# EAGLE board Buck (EAGLE 9.6.2)
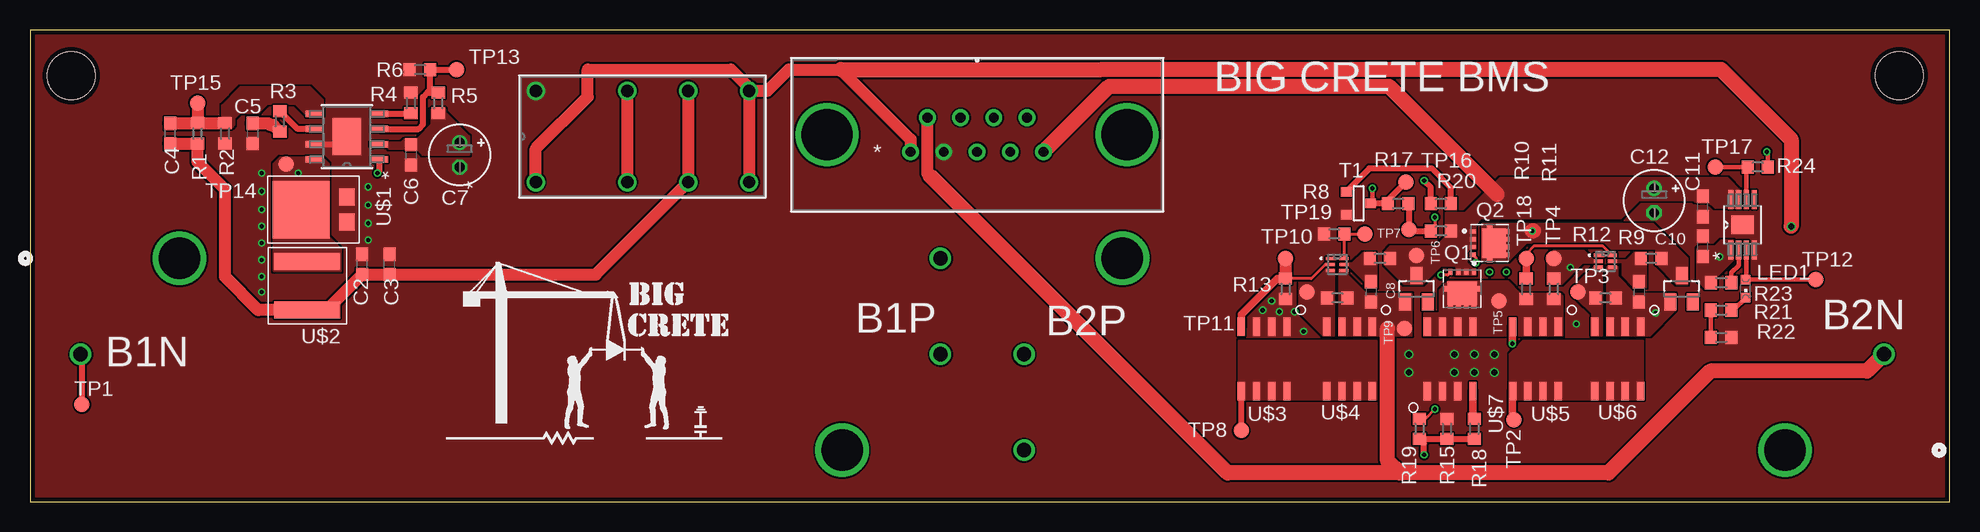
[diagram p0: board, top side]
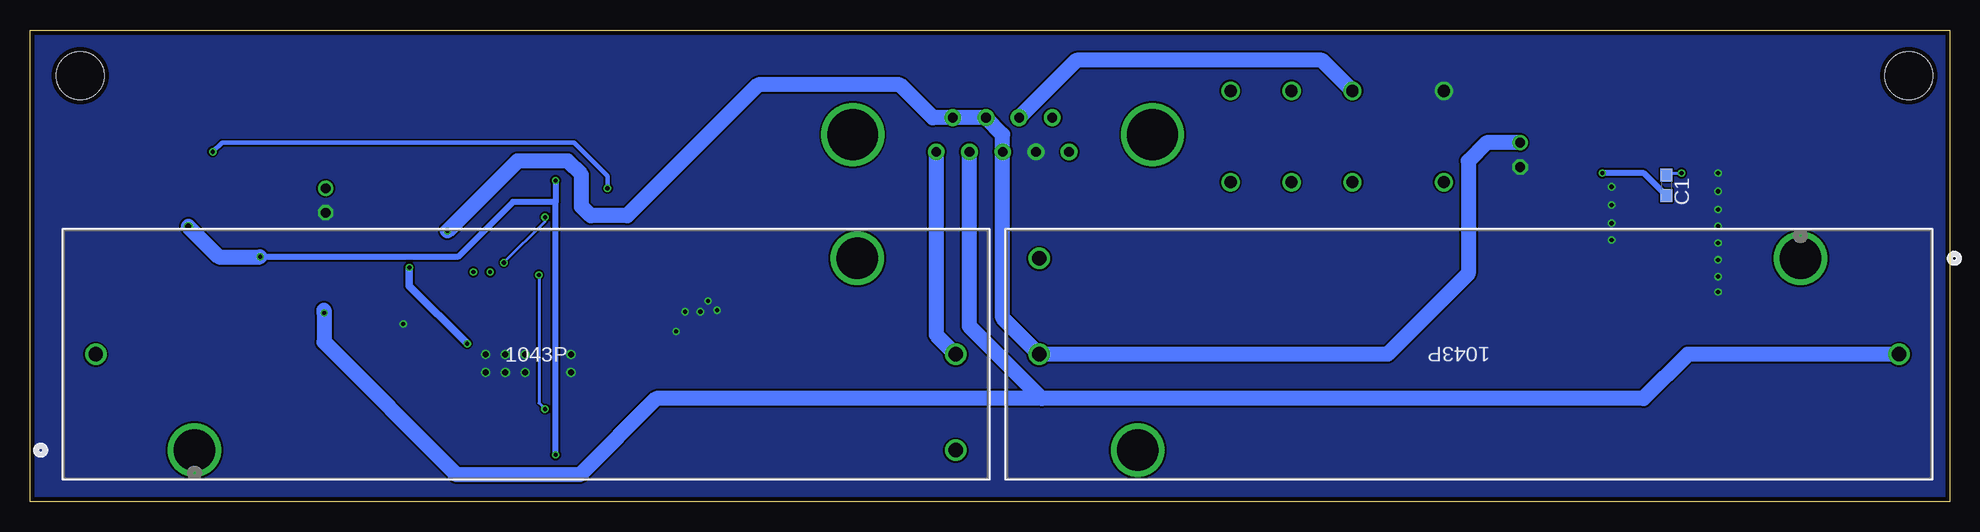
[diagram p1: board, bottom side, seen from below]

Size 160.02 x 39.37 mm. Coordinates in mm from the lower left corner, seen from the top.
Outline: 0,0 160.02,0 160.02,39.37 0,39.37 0,0
Copper layers (1*16): Top 0.035559375mm / dielectric 1.6mm / Bottom 0.035559375mm
Design rules "oshpark-2layer": minimum track width 6mil, minimum drill 10mil, track to track 6mil, track to pad 6mil, pad to pad 6mil, via to via 6mil, smd to smd 6mil, copper to edge 15mil, drill to drill 6mil, minimum pad ring 5mil, minimum via ring 5mil, stop-mask expansion 2.5mil, vias tented up to drill 0mil, thermal gap 10mil
Holes 3.99 mm at 3.43,35.56 155.83,35.56

## Footprints (pad centres in the part's own frame; a part is rotated, then mirrored left to right if it is on the bottom)
C0603 = smd 1.1 x 1: 1 -0.85,0; 2 0.85,0
E2-5 = drill 0.813 pad 1.27: + -1.016,0 | drill 0.813 pad 1.27 octagon: - 1.016,0
SOT23 = smd 1 x 1.4: 1 -0.95,-1.1; 2 0.95,-1.1; 3 0,1.1
CONN2_1043P_KEY = drill 3.454 pad 3.962: 1 0,0; 3 55.245,16.002 | drill 1.194 pad 1.194: 2 63.449,8.001; 4 -8.23,8.001; 5 63.449,0
CONN_L77TSEH09SOL2_AMP = drill 0.813 pad 1.397: 1 0,0; 2 2.769,0; 3 5.537,0; 4 8.306,0; 5 11.074,0; 6 1.397,2.845; 7 4.166,2.845; 8 6.934,2.845; 9 9.703,2.845 | drill 4.242 pad 4.242: 10 -6.96,1.422; 11 18.034,1.422
CHIPLED_0603 = smd 0.8 x 0.8: A 0,-0.75; C 0,0.75
TRANS_AONR21321 = smd 0.5 x 0.35: 1 -1.4,0.975; 2 -1.4,0.325; 3 -1.4,-0.325; 4 -1.4,-0.975 | smd 0.3 x 0.4: 5 1.5,-0.975; 6 1.5,-0.325; 7 1.5,0.325; 8 1.5,0.975 | smd 1.98 x 2.45: 9 0.36,0 | smd 0.43 x 0.38: 9_1 0,1.415; 9_2 0,-1.415
R0603 = smd 1 x 1.1: 1 -0.85,0; 2 0.85,0
SOT-23 = smd 0.787 x 0.889: 1 0.025,-1.016; 2 -0.94,1.016; 3 0.991,1.016
TP13R = smd 1.3 x 1.3: TP 0,0
DDA8_3P1X2P4_TEX = smd 1.46 x 0.533: 1 -2.724,1.905; 2 -2.724,0.635; 3 -2.724,-0.635; 4 -2.724,-1.905; 5 2.724,-1.905; 6 2.724,-0.635; 7 2.724,0.635; 8 2.724,1.905 | smd 2.4 x 3.1: EPAD 0,0
DSE6_TEX = smd 0.85 x 0.28: 1 -0.525,0.5 | smd 0.75 x 0.28: 2 -0.575,0; 3 -0.575,-0.5; 4 0.575,-0.5; 5 0.575,0; 6 0.575,0.5
DGN8_1P57X1P89 = smd 1.575 x 0.432: 1 -2.095,0.975; 2 -2.095,0.325; 3 -2.095,-0.325; 4 -2.095,-0.975; 5 2.095,-0.975; 6 2.095,-0.325; 7 2.095,0.325; 8 2.095,0.975 | smd 1.57 x 1.89: 9 0,0
RELAY8_J104D2C5VDC.20S_CRS = drill 1.016 pad 1.524: 1 0,0; 2 0,-7.62; 3 0,-12.7; 4 0,-17.78; 5 7.62,-17.78; 6 7.62,-12.7; 7 7.62,-7.62; 8 7.62,0
TO-227A = smd 1.397 x 1.27: A$1 -1.041,-3.81; A$2 1.041,-3.81 | smd 4.801 x 4.724: K 0,0
XAL6060 = smd 1.422 x 5.486: 1 -2.019,0; 2 2.019,0
SO-8 = smd 0.61 x 1.549: 1 -1.905,-2.692; 2 -0.635,-2.692; 3 0.635,-2.692; 4 1.905,-2.692; 5 1.905,2.692; 6 0.635,2.692; 7 -0.635,2.692; 8 -1.905,2.692

## Placement (x,y rotation side)
C1  0.1uF  [C0603]  23.62,26.42 270 bottom
C2  22uF  [C0603]  27.69,19.81 90 top
C3  22uF  [C0603]  29.97,19.81 90 top
C4  220pF  [C0603]  11.68,30.73 90 top
C5  0.01uF  [C0603]  18.54,30.73 270 top
C6  4.7uF  [C0603]  31.75,28.96 270 top
C7  47uF  [E2-5]  35.81,28.96 270 top
C8  0.1uF  [C0603]  111.76,17.53 270 top
C9  0.1uF  [C0603]  134.11,17.53 270 top
C10  0.1uF  [C0603]  139.45,21.34 90 top
C11  0.1uF  [C0603]  139.45,24.64 90 top
C12  47uF  [E2-5]  135.38,25.15 270 top
D1  [SOT23]  137.67,17.78 0 top
D2  [SOT23]  115.57,17.78 0 top
J1  1043P  [CONN2_1043P_KEY]  12.45,20.32 180 bottom
J2  1043P  [CONN2_1043P_KEY]  146.3,4.32 0 bottom
J3  L77TSEH09SOL2  [CONN_L77TSEH09SOL2_AMP]  73.41,29.21 0 top
LED1  [CHIPLED_0603]  143,17.78 180 top
Q1  AONR21321  [TRANS_AONR21321]  119.38,17.78 270 top
Q2  AONR21321  [TRANS_AONR21321]  121.67,21.59 0 top
R1  52.3k  [R0603]  13.97,30.73 270 top
R2  10k  [R0603]  16.26,30.73 90 top
R3  12.7k  [R0603]  20.83,31.75 90 top
R4  174k  [R0603]  31.75,33.27 270 top
R5  45k  [R0603]  34.04,33.27 270 top
R6  10k  [R0603]  32.51,36.07 0 top
R7  330  [R0603]  112.52,20.32 180 top
R8  2.2k  [R0603]  108.71,22.35 180 top
R9  330  [R0603]  135.13,20.32 180 top
R10  2.2k  [R0603]  124.71,17.78 270 top
R11  5M  [R0603]  127,17.78 90 top
R12  5M  [R0603]  131.32,17.02 0 top
R13  5M  [R0603]  104.65,17.78 90 top
R14  5M  [R0603]  108.97,17.02 0 top
R15  10k  [R0603]  118.11,6.1 90 top
R16  10k  [R0603]  117.6,22.61 0 top
R17  100  [R0603]  114.05,24.89 0 top
R18  100  [R0603]  120.4,6.1 270 top
R19  100  [R0603]  115.82,6.1 90 top
R20  100  [R0603]  117.6,24.89 180 top
R21  100  [R0603]  140.97,16 180 top
R22  100  [R0603]  140.97,13.72 0 top
R23  10  [R0603]  140.97,18.29 180 top
R24  100  [R0603]  144.02,27.94 180 top
T1  [SOT-23]  110.74,24.89 90 top
TP1  TPTP13R  [TP13R]  4.32,8.13 0 top
TP2  TPTP13R  [TP13R]  123.7,6.86 0 top
TP3  TPTP13R  [TP13R]  129.03,17.53 0 top
TP4  TPTP13R  [TP13R]  127,20.32 0 top
TP5  TPTP13R  [TP13R]  122.43,16.76 0 top
TP6  TPTP13R  [TP13R]  115.57,20.57 0 top
TP7  TPTP13R  [TP13R]  114.94,22.73 0 top
TP8  TPTP13R  [TP13R]  100.97,5.97 0 top
TP9  TPTP13R  [TP13R]  114.55,14.48 0 top
TP10  TPTP13R  [TP13R]  104.65,20.32 0 top
TP11  TPTP13R  [TP13R]  106.43,17.53 0 top
TP12  TPTP13R  [TP13R]  148.84,18.54 0 top
TP13  TPTP13R  [TP13R]  35.56,36.07 0 top
TP14  TPTP13R  [TP13R]  21.34,28.19 0 top
TP15  TPTP13R  [TP13R]  13.97,33.27 0 top
TP16  TPTP13R  [TP13R]  114.68,26.67 0 top
TP17  TPTP13R  [TP13R]  140.46,27.94 0 top
TP18  TPTP13R  [TP13R]  124.71,20.32 0 top
TP19  TPTP13R  [TP13R]  111.25,22.35 0 top
U1  TPS54540DDA  [DDA8_3P1X2P4_TEX]  26.42,30.48 180 top
U2  BQ29732DSER  [DSE6_TEX]  108.97,19.81 0 top
U3  BQ29732DSER  [DSE6_TEX]  131.32,20.07 0 top
U4  BQ24202DGN  [DGN8_1P57X1P89]  142.75,23.11 90 top
U5  J104D2C5VDC.20S  [RELAY8_J104D2C5VDC.20S_CRS]  42.16,26.67 90 top
U$1  SS3P5LHM3_A/H  [TO-227A]  22.61,24.38 90 top
U$2  XAL6060-223MEC  [XAL6060]  23.11,18.03 270 top
U$3  DMG4496SSS  [SO-8]  102.87,11.94 180 top
U$4  DMG4496SSS  [SO-8]  109.98,11.94 180 top
U$5  DMG4496SSS  [SO-8]  125.48,11.94 180 top
U$6  DMG4496SSS  [SO-8]  132.33,11.94 180 top
U$7  DMG4496SSS  [SO-8]  118.36,11.94 0 top

## Library data of the parts
C1-C12 = rcl; SPICEPREFIX: C
D1 D2 = diode
J1 J2 = BIGCRETE; COPYRIGHT: Copyright (C) 2022 Ultra Librarian. All rights reserved.; DIGI-KEY_PART_NUMBER_1: 36-1043P-ND; MANUFACTURER_PART_NUMBER: 1043P; MFR_NAME: Keystone Electronics
J3 = BIGCRETE; COPYRIGHT: Copyright (C) 2022 Ultra Librarian. All rights reserved.; DIGI-KEY_PART_NUMBER_1: L77TSEH09SOL2-ND; MANUFACTURER_PART_NUMBER: L77TSEH09SOL2; MFR_NAME: Amphenol ICC
LED1 = led
Q1 Q2 = AONR21321; DESCRIPTION: P-Channel 30 V 24A (Tc) 4.1W (Ta), 24W (Tc) Surface Mount 8-DFN-EP (3x3); DIGI-KEY_PART_NUMBER: 785-1797-2-ND; MF: Alpha &; MP: AONR21321; PACKAGE: PowerVDFN-8 Alpha &amp; Omega Semiconductor Inc.
R1-R24 = rcl; SPICEPREFIX: R
T1 = zetex; OC_FARNELL: unknown; OC_NEWARK: unknown
TP1-TP19 = testpad
U1 = BIGCRETE; COPYRIGHT: Copyright (C) 2022 Ultra Librarian. All rights reserved.; MANUFACTURER_PART_NUMBER: TPS54540DDA; MFR_NAME: Texas Instruments
U2 U3 = BIGCRETE; COPYRIGHT: Copyright (C) 2022 Ultra Librarian. All rights reserved.; MANUFACTURER_PART_NUMBER: BQ29732DSER; MFR_NAME: Texas Instruments
U4 = BIGCRETE; COPYRIGHT: Copyright (C) 2022 Ultra Librarian. All rights reserved.; DIGI-KEY_PART_NUMBER_1: 296-12411-5-ND; DIGI-KEY_PART_NUMBER_2: 2156-BQ24202DGN-ND; MANUFACTURER_PART_NUMBER: BQ24202DGN; MFR_NAME: Texas Instruments
U5 = BIGCRETE; COPYRIGHT: Copyright (C) 2022 Ultra Librarian. All rights reserved.; DIGI-KEY_PART_NUMBER_1: 2449-J104D2C5VDC.20S-ND; MANUFACTURER_PART_NUMBER: J104D2C5VDC.20S; MFR_NAME: CIT Relay & Switch
U$1-U$7 = BIGCRETE

## Nets
B1N: C9.2 D1.1 J1.4 J3.4 R12.2 TP1.TP U3.4 U$6.1 U$6.2 U$6.3
B1P: C6.1 C7.+ D1.3 J1.2 J3.3 J3.8 J3.9 Q2.5 Q2.6 Q2.7 Q2.8 Q2.9 Q2.9_1 Q2.9_2 R5.2 R9.1 U1.2
B2N: C8.2 D2.1 J2.4 J3.6 R14.2 TP9.TP U2.4 U$4.1 U$4.2 U$4.3
B2P: C11.2 C12.+ D2.3 J2.2 J3.5 Q1.1 Q1.2 Q1.3 Q2.1 Q2.2 Q2.3 R7.1 R16.2 TP6.TP U4.7 U4.8
CHARGE: C10.1 J3.1 R15.1 R18.2 R19.1 R20.2 R23.2 U4.1 U5.1 U5.4 U5.5
FPGA_OUT: J3.7 U5.2 U5.7
GND: C2.2 C3.2 C5.2 C6.2 C7.- C10.2 C11.1 C12.- J3.2 R2.1 R4.1 R6.1 R8.2 R13.1 R15.2 R22.2 T1.2 U1.7 U1.EPAD U4.4 U4.9 U5.8 U$1.A$1 U$1.A$2 U$3.1 U$3.2 U$3.3 U$7.1 U$7.2 U$7.3
N$1: C1.2 U1.1
N$2: C1.1 TP14.TP U1.8 U$1.K U$2.1
N$3: C2.1 C3.1 C4.1 R1.2 U5.3 U5.6 U$2.2
N$4: C5.1 R3.1
N$5: C4.2 R1.1 R2.2 TP15.TP U1.5
N$6: R3.2 U1.6
N$7: Q2.4 R16.1 R17.2 TP7.TP
N$8: R4.2 U1.4
N$9: R5.1 R6.2 TP13.TP U1.3
N$10: TP8.TP U$3.5 U$3.6 U$3.7 U$3.8 U$4.5 U$4.6 U$4.7 U$4.8
N$11: R13.2 TP10.TP U2.2 U$3.4
N$12: R14.1 TP11.TP U2.3 U$4.4
N$14: C8.1 R7.2 U2.5
N$15: TP2.TP U$5.5 U$5.6 U$5.7 U$5.8 U$6.5 U$6.6 U$6.7 U$6.8
N$17: R8.1 TP19.TP U2.6
N$18: R11.2 TP4.TP U3.2 U$5.4
N$19: R24.2 TP17.TP U4.6
N$20: R12.1 TP3.TP U3.3 U$6.4
N$22: C9.1 R9.2 U3.5
N$24: R10.1 TP18.TP U3.6
N$25: R18.1 U$7.4
N$26: Q1.4 R19.2
N$27: Q1.5 Q1.6 Q1.7 Q1.8 Q1.9 Q1.9_1 Q1.9_2 R10.2 R11.1 TP5.TP U$5.1 U$5.2 U$5.3 U$7.5 U$7.6 U$7.7 U$7.8
N$28: R20.1 T1.3
N$29: LED1.C R21.1
N$30: R21.2 R22.1
N$31: LED1.A TP12.TP U4.3
N$33: R23.1 U4.2
~CHARGE: R17.1 R24.1 T1.1 TP16.TP

## Tracks (layer width: path | path; a pad name or v marks a point on that pad's centre or on a via)
B1N  (via drill 0.35)
  Top 0.508: J1.4 4.32,12.22 TP1.TP
  Bottom 1.27: J1.4 21.84,12.32 25.53,8.64 75.69,8.64 | J3.4 81.71,14.66 75.69,8.64 | 75.69,8.64 107.82,8.64 114.17,2.29 124.46,2.29 135.51,13.33 v135.51,15.77 135.51,16
  pour Top (no thermals): 131.44,19.66 131.44,13.84 135,13.84 137.16,16 137.16,17.4 133.73,17.4 132.33,18.8 132.33,19.66
B1P  (via drill 0.35)
  Top 1.27: v125.22,22.61 125.35,22.61
  Bottom 1.27: C7.+ 38.61,29.97 40.13,28.45 40.13,19.05 46.86,12.32 J1.2 78.94,15.37 J3.3 78.94,30.66 J3.8 J3.9 84.76,32.05 87.5,34.8 99.31,34.8 110.24,23.88 113.28,23.88 114.05,24.64 114.05,27.3 115.19,28.45 119.38,28.45 v125.22,22.61
  pour Top (no thermals): 28.45,29.97 30.99,29.97 31.24,30.23 32.26,30.23 33.53,31.5 33.53,32.77 34.54,32.77 34.54,32.51 36.58,30.48 36.58,28.96 32.77,28.96 32.26,29.46 29.97,29.46 29.72,29.72 28.45,29.72
  pour Top (no thermals): 121.03,20.07 121.03,23.24 135.25,23.24 138.18,20.32 138.18,18.16 137.29,18.16 135.51,19.94 135.51,21.11 131.8,21.11 131.32,21.59 124.71,21.59 123.19,20.07
B2N
  Top 1.016: 75.06,27.18 74.8,27.43 J3.6
  Top 1.27: J2.4 153.14,10.92 140.08,10.92 131.57,2.41 114.17,2.41 | 114.17,2.41 113.16,3.43 113.16,14.48 | 114.17,2.41 99.82,2.41 75.06,27.18
  pour Top (no thermals): 109.09,19.38 109.09,13.84 115.19,13.84 115.19,17.4 111.36,17.4 109.86,18.9 109.86,19.38
B2P
  Top 1.27: J3.5 89.94,34.67 113.28,34.67 122.3,25.65
  Bottom 1.27: J3.5 84.48,13.94 J2.2
  pour Top (no thermals): 116.08,18.16 114.55,18.16 112.9,19.81 112.9,20.83 113.41,21.34 117.22,21.34 117.98,22.1 117.98,23.11 120.14,23.11 120.52,22.73 120.52,21.08 120.02,21.08 119.76,20.83 119.76,19.94 120.27,19.43 120.52,19.43 120.52,18.92 118.87,18.92 118.87,19.68 117.6,19.68
  pour Top (no thermals): 117.98,22.22 117.98,24.13 119.63,24.13 122.56,27.05 141.48,27.05 142.62,25.91 142.62,24.51 140.46,24.51 139.95,25.02 138.81,25.02 138.68,25.15 134.11,25.15 132.59,23.62 120.95,23.62 120.52,23.2 120.52,22.22
CHARGE  (via drill 0.35, 0.5)
  Top 0.508: R20.2 116.75,26.25 v116.2,26.8 | v116.2,3.94 116.2,4.86 R19.1 R15.1 R18.2
  Top 1.016: U5.5 U5.4 | U5.1 42.16,29.46 46.48,33.78 46.48,36.07 58.42,36.07 59.94,34.54 U5.5 | U5.5 61.47,34.29 63.25,36.07 67.56,36.07 73.41,30.23 J3.1
  Top 1.27: 67.56,36.07 89.33,36.07 89.35,36.09 140.94,36.09 146.81,30.23 v146.81,22.99
  Bottom 0.508: v116.2,26.8 116.2,25.02 | v116.2,3.94 116.2,25.02 | 116.2,25.02 119.76,25.02 124.33,20.45 v140.84,20.45
  Bottom 1.27: v146.81,22.99 144.27,20.45 v140.84,20.45
  pour Top (no thermals): 138.94,19.94 138.94,21.08 139.19,21.34 140.46,21.34 140.97,21.84 141.6,21.84 141.99,21.84 141.99,20.19 140.59,18.8 140.59,18.67 140.59,17.78 139.7,17.78 138.94,18.54
FPGA_OUT
  Top 1.016: U5.7 U5.2
  Bottom 1.27: U5.7 52.32,36.83 72.8,36.83 J3.7
GND  (via drill 0.35, 0.5)
  Top 0.508: U1.7 25.78,29.84 U1.EPAD
  other vias: 102.74,16 19.3,17.53 19.3,18.8 19.3,27.43 19.3,25.91 19.3,24.38 19.3,22.99 19.3,21.59 19.3,20.19 28.19,26.29 28.19,24.77 28.19,23.24 28.19,21.84 103.5,16.76 106.17,14.22 105.41,15.88 104.14,15.88 128.91,14.86 114.94,10.8 114.94,12.32 118.75,12.32 118.75,10.8 120.4,12.32 120.4,10.8 122.05,10.8 122.05,12.32
  pour Top (rank 6, no thermals): 0,39.37 160.02,39.37 160.02,0 0,0
  pour Bottom (rank 6, no thermals): 0,39.37 160.02,39.37 160.02,0 0,0
N$1  (via drill 0.35)
  Top 0.508: v28.96,27.43 29.14,27.62 U1.1
  Bottom 0.508: C1.2 25.49,27.43 v28.96,27.43
N$2  (via drill 0.35)
  Bottom 0.254: C1.1 23.46,27.43 v22.35,27.43
  pour Top (no thermals): 23.11,28.7 20.83,28.7 20.32,28.19 20.32,26.67 20.32,19.3 25.91,19.3 25.91,20.83 25.91,21.08 24.89,22.1 24.89,28.19 24.38,28.7
N$3
  Top 1.016: U5.6 U5.3 47.16,18.96 C3.1 C2.1 24.74,16.02 U$2.2 19.04,16.02 16.26,18.8 16.26,26.07 13.97,28.36 R1.2 C4.1
N$4
  Top 1.016: C5.1 19.86,31.58 20,31.44 20.29,31.44 R3.1
N$5
  Top 1.016: TP15.TP R1.1 | C4.2 R1.1 | R1.1 R2.2
  pour Top (no thermals): 16,31.24 16.76,31.24 17.02,31.5 17.02,32 17.53,32.51 18.03,32.51 19.05,32.51 19.81,33.27 21.84,33.27 22.1,33.27 23.11,32.26 24.38,32.26 24.38,33.53 23.37,34.54 19.56,34.54 17.53,34.54 16,33.02
N$6
  Top 0.508: U1.6 22.31,31.11 R3.2
N$7  (via drill 0.35)
  Top 0.254: Q2.4 120.52,20.36 v120.52,19.96 | v117.09,23.75 117.09,22.95 R16.1
  Top 0.508: R17.2 114.94,24.85 TP7.TP 115.06,22.61 R16.1
  Bottom 0.254: v120.52,19.96 117.09,23.39 v117.09,23.75
N$8
  Top 0.508: U1.4 31.71,32.38 R4.2
N$9
  Top 0.508: U1.3 32.38,31.11 32.77,31.5 32.77,33.78 33.11,34.12 | 33.11,34.12 R5.1 | 33.11,34.12 33.36,34.38 R6.2 TP13.TP
N$10
  Top 0.508: TP8.TP U$3.5
  pour Top (no thermals): 100.71,8.51 100.71,13.46 112.27,13.46 112.27,8.51
N$11
  Top 0.254: U2.2 108.32,19.81 107.98,19.81 106.8,18.63 R13.2
  Top 0.635: U$3.4 100.97,15.62 103.97,18.63 R13.2
  Top 1.016: TP10.TP R13.2
N$12
  Top 0.254: 108.39,17.29 R14.1
  pour Top (no thermals): 107.82,13.84 105.79,15.88 105.79,18.29 105.92,18.41 106.93,18.41 107.95,19.43 108.71,19.43 108.71,13.84
N$14
  pour Top (no thermals): 109.22,19.94 110.24,19.94 111.12,20.83 112.14,20.83 112.14,19.94 112.27,19.81 112.27,17.91 111.28,17.91 111.28,18.38 109.98,19.68 109.22,19.68
N$15
  Top 0.635: TP2.TP 123.57,6.98 U$5.5
  pour Top (no thermals): 134.49,8.51 123.32,8.51 123.32,12.32 124.46,13.46 134.49,13.46
N$16  (via drill 0.35)
  other vias: 121.67,19.18
N$17
  Top 0.254: U2.6 109.56,20.33 R8.1 TP19.TP
N$18  (via drill 0.35)
  Top 0.635: U$5.4 v123.57,13.21
  Bottom 0.635: v123.57,13.21 128.4,18.03 v128.4,19.56
  pour Top (no thermals): 126.49,18.16 126.49,20.45 127,20.95 129.54,20.95 130.3,20.19 131.06,20.19 131.06,19.96 130.33,19.96 130.3,19.94 129.41,19.94 127.64,18.16
N$19
  Top 0.381: U4.6 143.07,27.88 143.13,27.94 R24.2 TP17.TP
N$20
  pour Top (no thermals): 131.06,19.66 131.06,13.84 130.18,13.84 130.18,15.75 129.03,16.89 129.03,18.29 130.4,19.66
N$21  (via drill 0.35)
  other vias: 123.06,19.18
N$22
  pour Top (no thermals): 131.57,20.19 133.1,20.19 133.73,20.83 134.75,20.83 134.75,17.91 133.73,17.91 132.72,18.92 132.72,19.96 131.57,19.96
N$24
  Top 0.254: U3.6 131.12,21.34 125.35,21.34 124.71,20.7 TP18.TP
  Top 0.635: R10.1 TP18.TP
N$25
  Top 0.635: U$7.4 120.27,7.07 R18.1
N$26  (via drill 0.35)
  Top 0.254: Q1.4 118.15,18.92 v117.6,18.92 | v117.09,7.75 116.29,6.95 R19.2
  Bottom 0.254: v117.6,18.92 117.6,8.25 v117.09,7.75
N$27
  pour Top (no thermals): 117.47,13.84 117.47,17.65 118.24,18.41 123.19,18.41 124.21,17.4 127.51,17.4 127.76,17.14 127.76,13.84 117.6,13.84
  pour Top (no thermals): 116.2,13.84 117.73,13.84 117.73,15.75 116.2,15.75
N$28
  Top 0.508: R20.1 118.45,26.2 116.84,27.81 111.63,27.81 109.73,25.91 T1.3
N$29
  Top 0.381: LED1.C 141.97,16 R21.1
N$30
  Top 0.381: R22.1 R21.2
N$31
  Top 0.381: U4.3 143.07,18.6 LED1.A 143.01,18.54 TP12.TP
N$33
  Top 0.381: U4.2 142.42,19.74 141.82,19.14 R23.1
~CHARGE  (via drill 0.35)
  Top 0.381: T1.1 111.89,25.04 v111.89,26.16 | v144.78,29.21 144.87,29.12 R24.1
  Top 0.508: T1.1 113.17,24.92 R17.1 113.2,25.18 TP16.TP
  Bottom 0.381: v144.78,29.21 144.02,29.97 114.68,29.97 111.89,27.18 v111.89,26.16

## Text on the board
tPlace: BIG CRETE BMS | B1P | B2P | B2N | B1N